# Altium PCB JIGUANG.PCBDOC
Units mm, origin at the board's own origin, x right, y up, seen from the top; angles counter-clockwise.
Board outline 932.43 x 301.62 mm, 2 copper layers (Top Layer, Bottom Layer); 64 components, 31 nets, 187 pads, 40 vias.
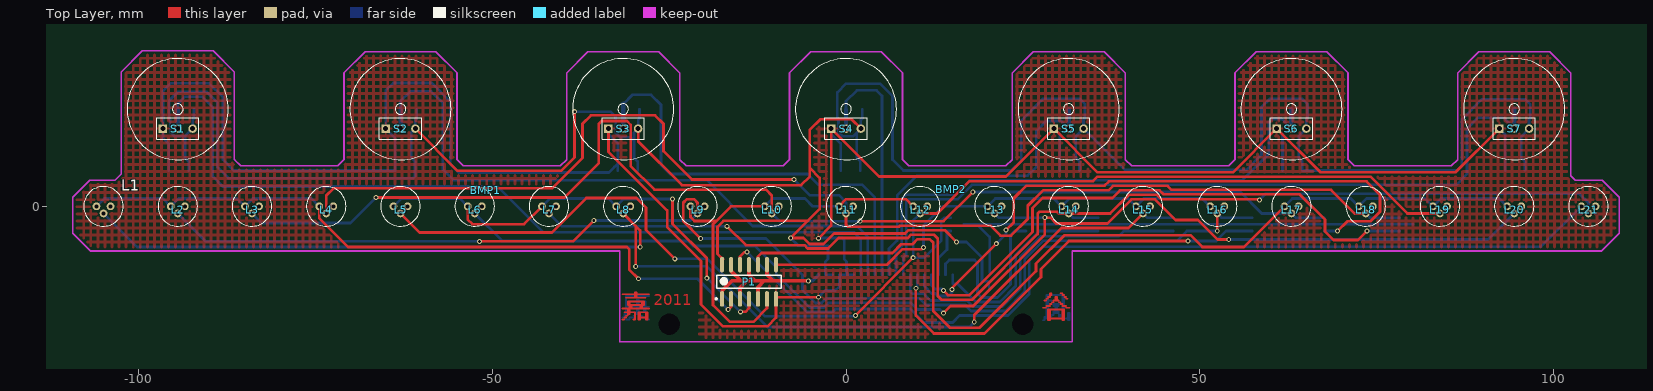
[diagram p0: Top Layer view]
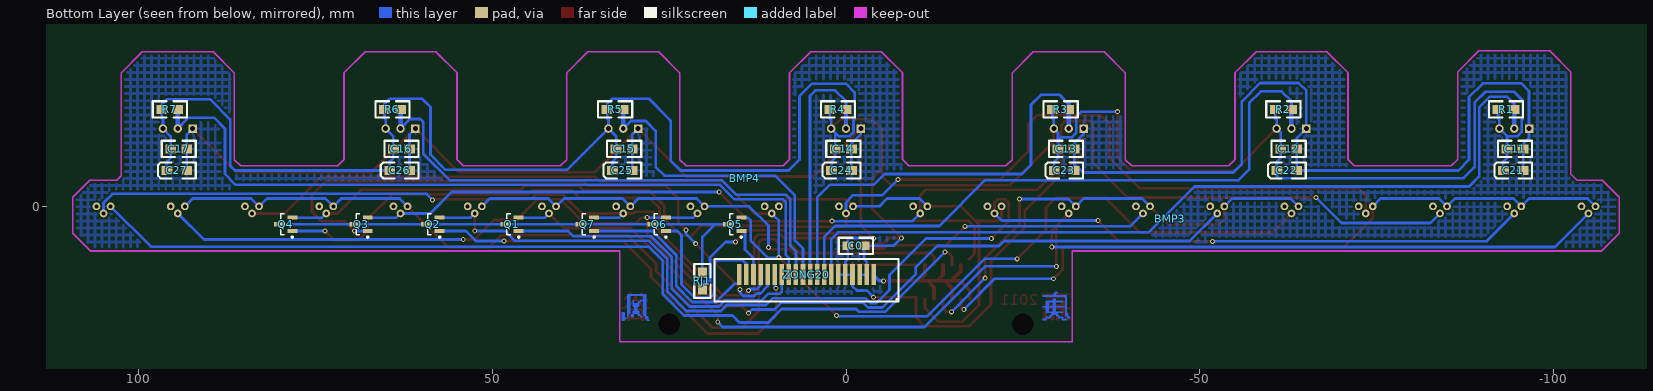
[diagram p1: Bottom Layer view, seen from below]

## Layer stack, top to bottom
Top Layer: signal copper 0.0356
Dielectric: dielectric 0.32, FR-4, Dk 4.8
Bottom Layer: signal copper 0.0356

## Board outline
-415.671,127.238 -415.671,-172.609 514.985,-172.609 516.763,-174.387 516.636,-174.26 516.636,126.476

## Design rules (kind name [scope] priority, off if disabled: settings)
Clearance [All] p1: gap=0.254
ComponentClearance [All] p1 off: gap=0.254 collisioncheckmode=3 verticalgap=0.254
PolygonConnect [All] p1: connectstyle=Relief reliefconductorwidth=0.254 reliefentries=4 polygonreliefangle="90 Angle"
RoutingVias [All] p1: holewidth=0.4 width=0.7 viastyle="Through Hole" minholewidth=0.4 minwidth=0.7 maxholewidth=0.711 maxwidth=1.27
SolderMaskExpansion [All] p1: expansion=0.102
TestPointUsage [All] p1: valid=0 allowmultiple=FALSE
Testpoint [All] p1: side=15 testpointundercomponent=TRUE minsize=1.016 maxsize=2.54 preferedsize=1.524 minholesize=0 maxholesize=1.016 preferedholesize=0.813 testpointgrid=0.025 style=1023 order=0123456789
Width [All] p1: maxlimit=1.778 minlimit=0.254 preferedwidth=0.254 toplayer_prefwidth=0.381 bottomlayer_prefwidth=0.381 minimp=50.000000 maximp=50.000000 favimp=50.000000
18 further rules are at their usual default settings.

## Classes and differential pairs
component class jiguang: C0 C11 C12 C13 C14 C15 C16 C17 C21 C22 C23 C24 C25 C26 C27 L1 L2 L3 L4 L5 L6 L7 L8 L9 L10 L11 L12 L13 L14 L15 L16 L17 L18 L19 L20 L21 P1 Q1 Q2 Q3 Q4 Q5 Q6 Q7 R1 R2 R3 R4 R5 R6 R7 RJ1 S1 S2 S3 S4 S5 S6 S7 ZONG20

## Components (designator, comment, footprint, x,y, rotation, side; value= is the part's Value field where it differs from the comment)
BMP1 "" BMP1#1 -50.927,2.286 r0 top
BMP2 "" BMP1#2 14.859,2.413 r0 top
BMP3 "" BMP1#3 -45.847,-1.778 r0 bottom
BMP4 "" BMP1#4 14.351,3.937 r0 bottom
C0 "CAP" 0805BB -2.54,-5.588 r0 top
C11 "CAP" 0805BB -93.472,8.112 r180 top
C12 "CAP" 0805BB -61.468,8.112 r180 top
C13 "CAP" 0805BB -29.972,8.112 r180 top
C14 "CAP" 0805BB 1.524,8.112 r180 top
C15 "CAP" 0805BB 32.512,8.112 r180 top
C16 "CAP" 0805BB 64.008,8.112 r180 top
C17 "CAP" 0805BB 95.504,8.112 r180 top
C21 "CAP2" 3216B -92.964,5.064 r0 top
C22 "CAP2" 3216B -60.96,5.064 r0 top
C23 "CAP2" 3216B -29.464,5.064 r0 top
C24 "CAP2" 3216B 2.032,5.064 r0 top
C25 "CAP2" 3216B 33.02,5.064 r0 top
C26 "CAP2" 3216B 64.516,5.064 r0 top
C27 "CAP2" 3216B 96.012,5.064 r0 top
L1 "CON3" FASHE -105,-0.016 r0 top
L2 "CON3" FASHE -94.5,-0.016 r0 top
L3 "CON3" FASHE -84,-0.016 r0 top
L4 "CON3" FASHE -73.5,-0.016 r0 top
L5 "CON3" FASHE -63,-0.016 r0 top
L6 "CON3" FASHE -52.5,-0.016 r0 top
L7 "CON3" FASHE -42,-0.016 r0 top
L8 "CON3" FASHE -31.5,-0.016 r0 top
L9 "CON3" FASHE -21,-0.016 r0 top
L10 "CON3" FASHE -10.5,-0.016 r0 top
L11 "CON3" FASHE 0,-0.016 r0 top
L12 "CON3" FASHE 10.5,-0.016 r0 top
L13 "CON3" FASHE 21,-0.016 r0 top
L14 "CON3" FASHE 31.5,-0.016 r0 top
L15 "CON3" FASHE 42,-0.016 r0 top
L16 "CON3" FASHE 52.5,-0.016 r0 top
L17 "CON3" FASHE 63,-0.016 r0 top
L18 "CON3" FASHE 73.5,-0.016 r0 top
L19 "CON3" FASHE 84,-0.016 r0 top
L20 "CON3" FASHE 94.5,-0.016 r0 top
L21 "CON3" FASHE 105,-0.016 r0 top
P1 "Header 7X2A" 74LS04SOP -13.716,-10.684 r90 top
Q1 "2N3904" 3904 47.244,-2.556 r0 bottom
Q2 "2N3904" 3904 58.42,-2.556 r0 bottom
Q3 "2N3904" 3904 68.58,-2.556 r0 bottom
Q4 "2N3904" 3904 79.248,-2.556 r0 bottom
Q5 "2N3904" 3904 15.748,-2.556 r0 bottom
Q6 "2N3904" 3904 26.416,-2.556 r0 bottom
Q7 "2N3904" 3904 36.576,-2.556 r0 bottom
R1 "RES2" 0805BB -94.488,13.7 r0 top
R2 "RES2" 0805BB -62.992,13.7 r0 top
R3 "RES2" 0805BB -31.496,13.7 r0 top
R4 "RES2" 0805BB 0,13.7 r0 top
R5 "RES2" 0805BB 31.496,13.7 r0 top
R6 "RES2" 0805BB 62.992,13.7 r0 top
R7 "RES2" 0805BB 94.488,13.7 r0 top
RJ1 "Res1" 0805 20.32,-11.7 r90 bottom
S1 "CON3" JIESHOU -94.5,10.984 r0 top
S2 "CON3" JIESHOU -63,10.984 r0 top
S3 "CON3" JIESHOU -31.5,10.984 r0 top
S4 "CON3" JIESHOU 0,10.984 r0 top
S5 "CON3" JIESHOU 31.5,10.984 r0 top
S6 "CON3" JIESHOU 63,10.984 r0 top
S7 "CON3" JIESHOU 94.5,10.984 r0 top
ZONG20 "CON20" ZONG20 5.08,-9.668 r0 top

## Footprints (in the part's own frame and the unit in brackets; to place one, negate y for a bottom-side part, rotate by r counter-clockwise, add the part's x,y. Pads: shape width x height; smd on the part's side, far side on the other; paste and mask are expansions set on the pad)
74LS04SOP [mm]
  oval 2.2x0.6 smd: 1(-2.425,3.81) 2(-2.425,2.54) 3(-2.425,1.27) 4(-2.425,0) 5(-2.425,-1.27) 6(-2.425,-2.54) 7(-2.425,-3.81) 8(2.425,-3.81) 9(2.425,-2.54) 10(2.425,-1.27) 11(2.425,0) 12(2.425,1.27) 13(2.425,2.54) 14(2.425,3.81)
  silkscreen extent -2.55,-4.55 0.93,4.78
0805 [mil]
  rect 60x50 smd: 1(0,0) 2(90,0)
  silkscreen extent -50,-45 140,45
0805BB [mil]
  rect 60x50 smd far side: 1(0,0) 2(90,0)
3216B [mil]
  rect 60x50 smd far side: 1(0,0) 2(-110,0)
3904 [mm] "SOT23, 3-Leads, Body 3.0x2.5mm (max), Pitch 0.95mm, IPC Medium Density"
  rect 1.4x0.6 smd: 1(-0.95,-0.95) 2(-0.95,0.95) 3(0.95,0)
  silkscreen extent -1.07,-1.5 0.7,1.92
BMP1#1 [mm]
  Top Layer lines w0.254: 19.304,-18.288 19.558,-18.288 ; 19.304,-16.764 23.114,-16.764 ; 19.304,-14.732 23.114,-14.732 ; 19.558,-18.034 19.812,-18.034 ; 19.558,-17.272 21.082,-17.272 21.082,-18.288 20.828,-18.288 ; 19.812,-17.78 20.066,-17.78 20.066,-16.764 ; 19.812,-15.24 22.606,-15.24 ; 20.066,-17.526 20.32,-17.526 20.32,-15.748 ; 20.066,-17.018 20.32,-17.018 ; 20.066,-16.002 20.32,-16.002 ; 20.32,-16.51 20.574,-16.51 ; 20.574,-16.764 20.574,-16.256 ; 21.082,-15.24 21.082,-14.478 21.336,-14.478 21.336,-15.24 ; 21.082,-14.986 21.336,-14.986 ; 21.59,-18.034 22.86,-18.034 ; 21.59,-17.78 21.844,-17.78 ; 21.59,-17.526 21.844,-17.526 ; 21.844,-17.272 21.844,-18.288 21.59,-18.288 21.59,-17.272 22.86,-17.272 22.86,-18.288 22.606,-18.288 22.606,-17.272 ; 21.844,-16.764 21.844,-16.256 ; 21.844,-16.51 22.098,-16.51 ; 22.098,-16.764 22.098,-15.748 ; 22.098,-16.002 22.352,-16.002 ; 22.606,-17.78 22.86,-17.78 ; 22.606,-17.526 22.86,-17.526 ; 20.066,-16.256 20.066,-15.748 22.352,-15.748 22.352,-16.256 20.066,-16.256
BMP1#2 [mm]
  Top Layer lines w0.254: 12.954,-16.764 13.462,-16.764 ; 13.208,-15.748 13.462,-15.748 ; 13.462,-16.51 13.97,-16.51 ; 13.462,-15.494 13.716,-15.494 ; 13.716,-18.288 16.002,-18.288 ; 13.716,-18.034 13.97,-18.034 ; 13.716,-17.78 13.97,-17.78 ; 13.716,-17.526 13.97,-17.526 ; 13.716,-17.272 13.97,-17.272 ; 13.716,-15.24 13.97,-15.24 13.97,-14.732 14.224,-14.732 ; 13.97,-17.018 13.97,-18.542 13.716,-18.542 13.716,-17.018 16.002,-17.018 16.002,-18.542 15.748,-18.542 15.748,-17.018 ; 13.97,-16.256 14.224,-16.256 ; 13.97,-14.986 14.224,-14.986 ; 14.224,-16.002 14.478,-16.002 ; 14.478,-15.748 15.24,-15.748 ; 14.732,-15.748 14.732,-15.24 14.986,-15.24 14.986,-15.748 ; 14.732,-15.494 14.986,-15.494 ; 15.24,-16.002 15.494,-16.002 ; 15.494,-16.256 15.748,-16.256 ; 15.494,-14.732 15.748,-14.732 ; 15.748,-18.034 16.002,-18.034 ; 15.748,-17.78 16.002,-17.78 ; 15.748,-17.526 16.002,-17.526 ; 15.748,-17.272 16.002,-17.272 ; 15.748,-16.51 16.256,-16.51 ; 15.748,-14.986 16.002,-14.986 ; 16.002,-15.24 16.256,-15.24 ; 16.256,-16.764 16.764,-16.764 ; 16.256,-15.494 16.51,-15.494
BMP1#3 [mm]
  Top Layer lines w0.254: 14.224,13.97 14.478,13.97 14.478,13.462 14.732,13.462 ; 14.478,13.716 14.732,13.716 14.732,10.922 18.034,10.922 ; 14.732,14.224 15.24,14.224 ; 14.732,12.446 18.034,12.446 ; 15.24,13.97 15.748,13.97 ; 15.24,13.208 17.526,13.208 17.526,11.684 15.24,11.684 ; 15.748,13.716 16.002,13.716 16.002,13.208 ; 16.002,13.462 16.764,13.462 ; 16.002,10.414 16.256,10.414 16.256,10.922 ; 16.256,13.462 16.256,11.43 16.51,11.43 16.51,13.462 ; 16.256,12.954 16.51,12.954 ; 16.256,12.7 16.51,12.7 ; 16.256,12.192 16.51,12.192 ; 16.256,11.938 16.51,11.938 ; 16.256,10.668 16.51,10.668 ; 16.764,13.208 16.764,13.716 17.018,13.716 ; 17.018,13.97 17.526,13.97 ; 17.272,13.208 17.272,11.684 ; 17.272,12.954 17.526,12.954 ; 17.272,12.7 17.526,12.7 ; 17.272,12.192 17.526,12.192 ; 17.272,11.938 17.526,11.938 ; 17.526,14.224 18.034,14.224
BMP1#4 [mm]
  Top Layer lines w0.254: 13.462,20.066 13.716,20.066 13.716,19.558 13.97,19.558 ; 13.716,19.812 13.97,19.812 13.97,16.51 16.51,16.51 16.51,19.558 ; 13.97,19.304 14.224,19.304 14.224,16.51 ; 13.97,19.05 14.224,19.05 ; 13.97,18.796 14.224,18.796 ; 13.97,18.542 14.224,18.542 ; 13.97,18.288 14.224,18.288 ; 13.97,18.034 14.224,18.034 ; 13.97,17.78 14.224,17.78 ; 13.97,17.526 14.224,17.526 ; 13.97,17.272 14.732,17.272 ; 13.97,17.018 14.224,17.018 ; 13.97,16.764 14.224,16.764 ; 14.478,19.558 14.732,19.558 ; 14.732,19.304 14.986,19.304 14.986,18.796 15.748,18.796 15.748,19.558 16.002,19.558 ; 14.732,17.526 14.986,17.526 14.986,18.034 15.748,18.034 15.748,17.272 ; 14.986,19.05 15.748,19.05 ; 14.986,17.78 15.748,17.78 ; 15.24,19.05 15.24,17.78 ; 15.24,18.542 15.494,18.542 ; 15.24,18.288 15.494,18.288 ; 15.494,19.05 15.494,17.78 ; 15.748,19.304 16.002,19.304 ; 16.256,18.796 16.51,18.796 ; 16.256,18.542 16.51,18.542 ; 16.256,18.288 16.51,18.288 ; 16.256,18.034 16.51,18.034 ; 16.256,17.78 16.51,17.78 ; 16.256,17.526 16.51,17.526 ; 16.256,17.272 16.51,17.272 ; 16.256,17.018 16.51,17.018 ; 16.256,16.764 16.51,16.764 ; 16.256,16.51 16.256,19.05 16.51,19.05 ; 16.764,19.812 17.272,19.812 ; 17.018,19.558 17.272,19.558 ; 17.018,19.304 17.272,19.304 ; 17.018,20.066 17.018,19.05 17.272,19.05 17.272,20.066 17.018,20.066
FASHE [mm]
  round 1.1 hole 0.55: 1(0,-1) 2(-1,0) 3(1,0)
  silkscreen extent -2.8,-2.8 2.8,2.8
JIESHOU [mm]
  rect 1.2x1.2 hole 0.7: 1(-2.1,0)
  round 1.2 hole 0.7: 2(0,0) 3(2.1,0)
  silkscreen extent -7.15,-4.4 7.15,9.9
ZONG20 [mm]
  rect 0.65x3 smd far side: 1(-9,0) 2(-8,0) 3(-7,0) 4(-6,0) 5(-5,0) 6(-4,0) 7(-3,0) 8(-2,0) 9(-1,0) 10(0,0) 11(1,0) 12(2,0) 13(3,0) 14(4,0) 15(5,0) 16(6,0) 17(7,0) 18(8,0) 19(9,0) 20(10,0)

## Part data
C0 C11 C12 C13 C14 C15 C16 C17: "Capacitor"
C21 C22 C23 C24 C25 C26 C27: library part "CAPACITOR POL", "Capacitor"
L1 L2 L3 L4 L5 L6 L7 L8 L9 L10 L11 L12 L13 L14 L15 L16 L17 L18 L19 L20 L21 S1 S2 S3 S4 S5 S6 S7 ZONG20: "Connector"
P1: "Header, 7-Pin, Dual row"
Q1 Q2 Q3 Q4 Q5 Q6 Q7: "NPN General Purpose Amplifier"
RJ1: "Resistor"

## Free pads (board coordinates)
  round 0 hole 3: 0(-25,-16.7) 0(25,-16.7)

## Via types
v1: diameter 0.7, hole 0.4, Top Layer to Bottom Layer, 40 vias

## Nets (pads, with @x,y where several pads share a name; then routed paths per layer and width w, separated by ;. In a path a pad name is that pad's centre, name@x,y a point inside that pad or via, vN(x,y) a via of type N, cw(c..) or ccw(c..) an arc to the next point about the centre after c; other vN are vias at no path point)
-1: L1.2 L2.2 L3.2 L4.2 P1.2 | length 102.5
  Top Layer w0.381: L4.2 -74.5,-1.691 -70.427,-5.764 -30.981,-5.764 -30.67,-6.074 -30.67,-8.919 v1(-29.337,-10.252) ; v1(-16.662,-14.621) -16.256,-14.215 P1.2
  Bottom Layer w0.381: L1.2 -104.882,1.102 -96.618,1.102 L2.2 -94.382,1.102 -86.118,1.102 L3.2 -83.882,1.102 -75.618,1.102 L4.2 ; v1(-29.337,-10.252) -21.031,-10.252 v1(-16.662,-14.621)
-2: L5.2 L6.2 L7.2 L8.2 P1.4 | length 67.6
  Top Layer w0.381: L6.2 -53.5,-1.863 -52.832,-2.531 -45.515,-2.531 L7.2 ; v1(-24.536,1.025) -24.536,-2.505 -19.685,-7.357 v1(-19.685,-10.176) ; v1(-14.935,-14.926) -14.224,-14.926 -13.716,-14.418 P1.4
  Bottom Layer w0.381: L5.2 -62.882,1.102 -54.618,1.102 L6.2 ; L7.2 -41.882,1.102 -33.618,1.102 L8.2 -31.459,1.025 v1(-24.536,1.025) ; v1(-19.685,-10.176) v1(-14.935,-14.926)
-3: L9.2 L10.2 L11.2 L12.2 P1.6 | length 58.7
  Top Layer w0.381: L9.2 -22,-1.54 -21.448,-2.092 -18.332,-2.092 ; L10.2 -16.256,-0.016 -18.332,-2.092 ; P1.6 -11.176,-14.418 -13.111,-16.353 -16.429,-16.353 -18.796,-13.986 -18.796,-2.556 -18.332,-2.092 ; L11.2 0.016,1 8.484,1 L12.2
  Bottom Layer w0.381: L10.2 -10.382,1.102 -5.817,1.102 -4.699,-0.016 L11.2
-4: L13.2 L14.2 L15.2 L16.2 P1.8 | length 69.4
  Top Layer w0.381: P1.8 -9.906,-8.271 5.817,-8.271 8.009,-6.078 10.727,-6.078 v1(10.973,-5.833)
  Bottom Layer w0.381: v1(10.973,-5.833) 10.973,-2.734 13.691,-0.016 L13.2 21.118,1.102 29.382,1.102 L14.2 31.618,1.102 39.882,1.102 L15.2 42.118,1.102 50.382,1.102 L16.2
-5: L17.2 L18.2 L19.2 L20.2 P1.10 | length 130.8
  Top Layer w0.381: P1.10 -12.446,-7.128 -11.92,-6.602 6.546,-6.602 7.772,-5.375 9.391,-5.375 10.109,-4.657 11.836,-4.657 12.337,-5.158 12.337,-14.817 14.707,-17.186 18.875,-17.186 26.883,-9.178 26.883,-8.109 30.868,-4.124 48.768,-4.124 50.401,-5.756 56.26,-5.756 L17.2
  Bottom Layer w0.381: L17.2 63.118,1.102 71.382,1.102 L18.2 73.618,1.102 81.882,1.102 L19.2 84.118,1.102 92.382,1.102 L20.2
-6: L21.2 P1.12 | length 134.4
  Top Layer w0.381: P1.12 -14.986,-7.103 -14.376,-6.493 v1(-13.995,-6.493)
  Bottom Layer w0.381: v1(-13.995,-6.493) -5.546,-14.942 -1.845,-14.942 -1.448,-14.545 9.109,-14.545 10.995,-16.432 15.095,-16.432 16.08,-15.446 22.908,-15.446 25.908,-12.446 25.908,-7.756 27.949,-5.715 98.301,-5.715 L21.2
A0: Q1.2 ZONG20.14 | length 47.6
  Bottom Layer w0.381: ZONG20.14 9.08,-12.075 9.398,-12.393 11.014,-12.393 11.953,-13.333 17.127,-13.333 17.97,-14.176 22.146,-14.176 24.638,-11.684 24.638,-7.158 27.538,-4.258 38.532,-4.258 39.284,-3.506 Q1.2
A1: Q2.2 ZONG20.15 | length 61.2
  Top Layer w0.381: v1(9.881,-11.598) 9.881,-15.459 12.421,-17.999 19.591,-17.999 27.565,-10.025 27.565,-8.871 31.518,-4.918 v1(48.362,-4.918)
  Bottom Layer w0.381: v1(9.881,-11.598) 10.08,-11.399 ZONG20.15 ; v1(48.362,-4.918) 52.349,-4.918 53.762,-3.506 Q2.2
A2: Q3.2 ZONG20.16 | length 88.2
  Top Layer w0.381: v1(15.011,-11.776) 15.011,-11.548 v1(21.26,-5.299) ; v1(22.631,-3.369) 23.724,-2.277 23.724,1.127 25.502,2.905 36.551,2.905 37.164,3.519 73.612,3.519 75.514,1.617 75.514,-0.778 74.168,-2.124 70.902,-2.124 v1(69.52,-3.506)
  Bottom Layer w0.381: ZONG20.16 11.08,-11.299 12.116,-12.335 12.617,-12.335 12.979,-12.698 14.478,-12.698 15.011,-12.164 v1(15.011,-11.776) ; v1(21.26,-5.299) 22.631,-3.928 v1(22.631,-3.369) ; Q3.2 v1(69.52,-3.506)
A3: Q4.2 ZONG20.17 | length 80.8
  Top Layer w0.381: v1(13.767,-11.903) 14.434,-12.571 17.443,-12.571 26.365,-3.648 26.365,-0.262 27.805,1.178 37.664,1.178 38.735,2.249 44.352,2.249 44.907,1.693 64.153,1.693 67.742,-1.896 67.742,-3.572 68.936,-4.766 72.4,-4.766 v1(73.66,-3.506)
  Bottom Layer w0.381: ZONG20.17 12.08,-11.192 12.588,-11.7 13.564,-11.7 v1(13.767,-11.903) ; v1(73.66,-3.506) Q4.2
A4: Q5.2 ZONG20.18 | length 7.2
  Bottom Layer w0.381: ZONG20.18 13.08,-7.332 14.277,-6.136 14.277,-3.506 Q5.2
A5: Q6.2 ZONG20.19 | length 25.8
  Bottom Layer w0.381: ZONG20.19 14.08,-8.144 14.613,-7.611 18.199,-7.611 18.605,-8.017 18.605,-12.367 19.145,-12.906 21.399,-12.906 23.266,-11.04 23.266,-4.09 23.851,-3.506 Q6.2
A6: Q7.2 ZONG20.20 | length 29.7
  Bottom Layer w0.381: ZONG20.20 15.08,-10.977 15.806,-10.977 18.37,-13.541 21.765,-13.541 24.003,-11.303 24.003,-6.895 27.392,-3.506 Q7.2
GND: C0.2 C11.2 C12.2 C13.2 C14.2 C15.2 C16.2 C17.2 C21.2 C22.2 C23.2 C24.2 C25.2 C26.2 C27.2 P1.7 S1.1 S2.1 S3.1 S4.1 S5.1 S6.1 S7.1 ZONG20.4 ZONG20.5 ZONG20.6 | length 337.3
  Top Layer w0.381: S3.1 -33.6,7.701 -25.297,-0.602 -25.297,-2.936 -20.498,-7.735 -20.498,-13.873 -17.382,-16.988 -11.13,-16.988 -9.906,-15.764 P1.7 -9.906,-12.868 v1(-3.912,-12.868) ; v1(-3.912,-4.537) -2.1,-2.726 S4.1 4.684,4.2 22.616,4.2 S5.1 35.595,4.789 54.705,4.789 S6.1 67.074,4.81 86.226,4.81 S7.1
  Bottom Layer w0.381: C21.2 C11.2 -95.758,8.786 -96.6,9.628 S1.1 -96.6,16.283 -95.504,17.379 -90.065,17.379 -88.113,15.427 -88.113,6.588 -86.589,5.064 C22.2 C12.2 -63.754,9.638 S2.1 -65.1,16.342 -64.008,17.434 -58.572,17.434 -55.982,14.843 -55.982,6.004 -54.762,4.785 -33.528,4.785 -32.753,5.559 -32.258,6.055 ; S3.1 -33.6,10.216 -32.258,8.874 C13.2 -32.258,6.055 ; C23.2 -32.258,6.055 ; v1(-3.912,-12.868) -2.972,-11.929 -1.524,-11.929 -0.92,-11.325 ZONG20.4 ZONG20.5 ; v1(-3.912,-4.537) -3.861,-4.486 -0.508,-4.486 -0.254,-4.74 C0.2 -0.254,-7.48 0.08,-7.814 ZONG20.5 ; S4.1 -2.1,10.212 -0.762,8.874 C14.2 C24.2 ; ZONG20.6 ZONG20.5 ; S5.1 30.226,10.158 C15.2 C25.2 ; S6.1 61.722,10.162 C16.2 C26.2 ; S7.1 93.218,10.166 C17.2 C27.2
IN: P1.1 P1.3 P1.5 P1.9 P1.11 P1.13 ZONG20.1 | length 29.9
  Top Layer w0.508: P1.1 -17.526,-11.954 -16.129,-10.557 -14.859,-10.557 ; P1.13 -16.256,-9.16 -14.859,-10.557 ; P1.3 -14.986,-11.573 -13.97,-10.557 ; P1.11 -13.716,-9.668 -12.827,-10.557 ; P1.5 -12.446,-11.446 -11.557,-10.557 ; P1.9 -11.176,-9.668 -10.287,-10.557 ; v1(-5.334,-10.557) -10.287,-10.557 ; -14.859,-10.557 -13.97,-10.557 ; -13.97,-10.557 -12.827,-10.557 ; -12.827,-10.557 -11.557,-10.557 ; -11.557,-10.557 -10.287,-10.557
  Bottom Layer w0.508: v1(-5.334,-10.557) -4.699,-10.557 -3.92,-9.778 ZONG20.1
NetQ1_3: Q1.3 Q2.3 Q3.3 Q4.3 Q5.3 Q6.3 Q7.3 RJ1.2 | length 71.1
  Bottom Layer w0.381: Q5.3 18.542,-2.556 ; RJ1.2 20.32,-4.334 18.542,-2.556 ; Q4.3 Q3.3 Q2.3 48.387,-2.556 Q1.3 Q7.3 Q6.3 18.542,-2.556
O1: R1.1 S1.2 ZONG20.7 | length 144
  Bottom Layer w0.381: ZONG20.7 2.08,-4.62 1.143,-3.683 -42.799,-3.683 -49.276,2.794 -88.138,2.794 -89.535,4.191 -89.535,13.97 -91.059,15.494 -93.472,15.494 -94.5,14.466 ; R1.1@-94.5,13.7 -94.5,14.466 ; R1.1@-94.5,13.7 -94.5,14.466 ; R1.1@-94.5,13.7 -94.5,14.466 ; R1.1@-94.5,13.7 -94.5,14.466 ; R1.1@-94.5,13.7 -94.5,14.466 ; R1.1@-94.5,13.7 -94.5,14.466 ; R1.1@-94.5,13.7 -94.5,14.466 ; R1.1@-94.5,13.7 -94.5,14.466
  Bottom Layer w0.635: S1.2 R1.1@-94.5,13.7 ; S1.2 R1.1@-94.5,13.7 ; S1.2 R1.1@-94.5,13.7 ; S1.2 R1.1@-94.5,13.7 ; S1.2 R1.1@-94.5,13.7 ; S1.2 R1.1@-94.5,13.7 ; S1.2 R1.1@-94.5,13.7 ; S1.2 R1.1@-94.5,13.7
O2: R2.1 S2.2 ZONG20.8 | length 89.9
  Bottom Layer w0.381: R2.1 -62.992,14.859 -61.595,16.256 -58.674,16.256 -57.023,14.605 -57.023,5.207 -55.499,3.683 -19.685,3.683 -13.208,-2.794 1.524,-2.794 3.08,-4.35 ZONG20.8
  Bottom Layer w0.635: S2.2 R2.1@-63,13.692
O3: R3.1 S3.2 ZONG20.9 | length 61.5
  Bottom Layer w0.381: -31.496,14.478 -30.226,15.748 -27.559,15.748 -26.162,14.351 -26.162,5.842 -24.892,4.572 -5.461,4.572 -3.937,3.048 2.286,3.048 4.08,1.254 ZONG20.9
  Bottom Layer w0.635: S3.2 R3.1@-31.5,13.696 ; R3.1 -31.496,14.478
O4: R4.1 S4.2 ZONG20.10 | length 35.2
  Bottom Layer w0.381: R4.1 0,14.859 1.524,16.383 4.318,16.383 5.08,15.621 ZONG20.10
  Bottom Layer w0.635: S4.2 R4.1
O5: R5.1 S5.2 ZONG20.11 | length 46.4
  Bottom Layer w0.381: ZONG20.11 6.08,-6.001 7.235,-4.846 7.235,1.508 10.055,4.327 25.679,4.327 26.924,5.572 26.924,10.652 28.321,12.049 30.435,12.049 S5.2
  Bottom Layer w0.635: R5.1 31.5,13.696 S5.2
O6: R6.1 S6.2 ZONG20.12 | length 76.7
  Bottom Layer w0.381: ZONG20.12 7.08,-6.414 7.87,-5.623 7.87,1 8.484,1.614 15.473,1.614 17.526,3.667 56.032,3.667 59.792,7.426 59.792,11.922 60.198,12.328 61.656,12.328 S6.2
  Bottom Layer w0.635: R6.1 63,13.692 S6.2
O7: R7.1 S7.2 ZONG20.13 | length 128.4
  Bottom Layer w0.381: ZONG20.13 8.08,-7.294 8.505,-6.868 8.505,0.594 8.89,0.979 15.752,0.979 17.805,3.032 86.309,3.032 87.833,4.556 87.833,10.957 89.408,12.532 92.952,12.532 S7.2
  Bottom Layer w0.635: S7.2 R7.1@94.5,13.7 ; S7.2 R7.1@94.5,13.7 ; S7.2 R7.1@94.5,13.7 ; S7.2 R7.1@94.5,13.7 ; S7.2 R7.1@94.5,13.7 ; S7.2 R7.1@94.5,13.7 ; S7.2 R7.1@94.5,13.7 ; S7.2 R7.1@94.5,13.7 ; R7.1@94.5,13.7 R7.1@94.5,13.815 ; R7.1@94.5,13.7 R7.1@94.5,13.815 ; R7.1@94.5,13.7 R7.1@94.5,13.815 ; R7.1@94.5,13.7 R7.1@94.5,13.815 ; R7.1@94.5,13.7 R7.1@94.5,13.815 ; R7.1@94.5,13.7 R7.1@94.5,13.815 ; R7.1@94.5,13.7 R7.1@94.5,13.815 ; R7.1@94.5,13.7 R7.1@94.5,13.815
V01: L1.1 L8.1 L15.1 Q1.1 | length 176.4
  Top Layer w0.381: L8.1 -29.743,-2.773 ; v1(-29.743,-8.5) -29.743,-2.773 ; v1(-29.108,-5.769) -29.108,-3.408 -29.743,-2.773 ; v1(18.134,-16.374) 18.134,-15.402 30.472,-3.064 39.952,-3.064 L15.1
  Bottom Layer w0.381: L1.1 -100.247,-5.769 v1(-29.108,-5.769) ; v1(-29.743,-8.5) -19.66,-8.5 -11.093,-17.067 17.441,-17.067 v1(18.134,-16.374) ; L15.1 42.59,-1.606 Q1.1
V02: L2.1 L9.1 L16.1 Q2.1 | length 180.9
  Top Layer w0.381: v1(-51.816,-4.969) -38.608,-4.969 v1(-35.662,-2.023) ; L9.1 -21,0.492 -21.508,1 -22.504,1 -23.012,0.492 -23.012,-2.099 v1(-20.549,-4.563) ; v1(52.5,-3.498) L16.1
  Bottom Layer w0.381: L2.1 -90.547,-4.969 v1(-51.816,-4.969) ; v1(-35.662,-2.023) -22.007,-2.023 L9.1 ; v1(-20.549,-4.563) -11.328,-4.563 -6.147,-9.744 -6.147,-11.843 -4.318,-13.672 -3.438,-13.672 -2.794,-13.028 10.379,-13.028 11.318,-13.968 16.864,-13.968 17.707,-14.811 22.527,-14.811 25.273,-12.065 25.273,-7.493 27.873,-4.893 46.807,-4.893 48.202,-3.498 v1(52.5,-3.498) ; L16.1 53.09,-1.606 Q2.1
V03: L3.1 L10.1 L17.1 Q3.1 | length 175.4
  Top Layer w0.381: v1(-66.472,1.229) -39.82,1.229 -34.95,6.098 -34.95,11.668 -34.569,12.049 -30.988,12.049 -30.455,11.516 -30.455,5.699 -27.095,2.339 -11.331,2.339 -10.5,1.508 L10.1 ; v1(1.974,-2.117) 13.799,-2.117 v1(17.932,2.016)
  Bottom Layer w0.381: L3.1 -82.638,-2.378 -70.079,-2.378 v1(-66.472,1.229) ; L10.1 -9.399,-2.117 v1(1.974,-2.117) ; v1(17.932,2.016) 55.764,2.016 58.796,-1.016 L17.1 63.59,-1.606 Q3.1
V04: L4.1 L11.1 L18.1 Q4.1 | length 179
  Top Layer w0.381: L4.1 -73.5,1.508 -72.484,2.524 -41.554,2.524 -37.262,6.817 -37.262,11.668 -36.068,12.862 -27,12.862 -25.806,11.668 -25.806,7.782 -21.793,3.769 v1(-7.341,3.769) ; L11.1 0,-2.607 0.305,-2.912 7.479,-2.912 7.638,-2.752 20.415,-2.752 21.826,-4.163 23.332,-4.163 25.701,-1.794 25.701,0.071 27.879,2.249 37.122,2.249 37.757,2.884 45.459,2.884 46.014,2.328 68.589,2.328 71.933,-1.016 L18.1
  Bottom Layer w0.381: v1(-7.341,3.769) -5.131,1.559 -1.016,1.559 0,0.543 L11.1 ; L18.1 74.09,-1.606 Q4.1
V05: L5.1 L12.1 L19.1 Q5.1 | length 181.6
  Top Layer w0.381: L5.1 -60.292,-3.724 -41.605,-3.724 -36.728,1.152 -29.642,1.152 -28.296,-0.194 -28.296,-3.343 v1(-24.206,-7.433) ; v1(1.321,-15.459) v1(9.5,-7.28) ; L12.1 12.903,-1.016 17.472,3.553 34.923,3.553 35.523,4.154 74.215,4.154 79.384,-1.016 L19.1
  Bottom Layer w0.381: v1(-24.206,-7.433) -19.609,-7.433 -11.464,-15.577 1.203,-15.577 v1(1.321,-15.459) ; L12.1 10.16,-1.356 9.5,-2.016 v1(9.5,-7.28) 11.075,-7.28 13.462,-4.893 13.462,-2.048 13.904,-1.606 Q5.1
V06: L6.1 L13.1 L20.1 Q6.1 | length 173.9
  Top Layer w0.381: v1(13.792,-15.129) 14.808,-14.113 17.999,-14.113 28.118,-3.994 v1(28.118,-1.606) 28.911,-1.606 29.734,-2.429 36.978,-2.429 40.386,0.979 43.688,0.979 46.624,-1.958 49.791,-1.958 52.548,-4.715 v1(54.127,-4.715)
  Bottom Layer w0.381: L6.1 -48.598,-4.918 -22.341,-4.918 -21.63,-5.629 -12.896,-5.629 -9.853,-8.672 -9.853,-9.626 -5.172,-14.307 -3.125,-14.307 -2.48,-13.663 9.167,-13.663 10.106,-14.603 13.266,-14.603 v1(13.792,-15.129) ; L13.1 21.59,-1.606 Q6.1 v1(28.118,-1.606) ; v1(54.127,-4.715) 90.801,-4.715 L20.1
V07: L7.1 L14.1 L21.1 Q7.1 | length 173.5
  Top Layer w0.381: v1(-16.815,-2.835) -14.148,-5.502 -5.881,-5.502 -5.416,-5.967 -2.522,-5.967 -1.046,-4.491 8.739,-4.491 9.208,-4.022 12.406,-4.022 12.972,-4.588 12.972,-12.716 13.48,-13.224 17.831,-13.224 27.102,-3.953 27.102,-1.032 27.356,-0.778 29.856,-0.778 30.094,-1.016 L14.1 37.355,-1.016 39.984,1.614 43.995,1.614 44.63,0.979 58.391,0.979 v1(58.471,0.898)
  Bottom Layer w0.381: L7.1 -40.181,-2.835 v1(-16.815,-2.835) ; L14.1 32.09,-1.606 Q7.1 ; v1(58.471,0.898) 59.334,1.762 103.73,1.762 105,0.492 L21.1
VCC: C0.1 C11.1 C12.1 C13.1 C14.1 C15.1 C16.1 C17.1 C21.1 C22.1 C23.1 C24.1 C25.1 C26.1 C27.1 P1.14 R1.2 R2.2 R3.2 R4.2 R5.2 R6.2 R7.2 RJ1.1 S1.3 S2.3 S3.3 S4.3 S5.3 S6.3 S7.3 ZONG20.2 ZONG20.3 | length 431.8
  Top Layer w0.381: S2.3 -54.929,5.013 -40.279,5.013 -38.405,6.887 v1(-38.405,13.37) ; S3.3 -29.4,9.189 -23.185,2.974 -6.357,2.974 -5.105,4.226 -5.105,10.83 -3.632,12.303 0.781,12.303 S4.3 ; P1.14@-17.399,-7.493 -18.161,-6.731 -18.161,-2.921 -17.341,-2.101 -17.341,-2.041 -5.378,-2.041 ; -5.105,5.385 -3.734,4.013 -3.734,-0.397 v1(-7.823,-4.486) -5.999,-4.486 -5.153,-5.332 -3.173,-5.332 -1.697,-3.856 8.37,-3.856 8.839,-3.387 13.963,-3.387 v1(15.621,-5.045)
  Bottom Layer w0.381: C21.1 -92.964,6.334 -93.472,6.842 C11.1 -93.472,9.915 ; R1.2 -92.202,12.425 -92.4,12.227 S1.3 ; R2.2 -60.706,12.421 -60.9,12.227 S2.3 -61.468,10.416 C12.1 -61.468,6.842 -60.96,6.334 C22.1 -60.96,4.226 -61.214,3.972 -87.351,3.972 -88.9,5.521 -88.9,14.64 -90.449,16.189 -94.488,16.189 -95.707,14.97 -95.707,12.328 -95.555,12.176 -95.555,10.474 -94.996,9.915 -93.472,9.915 ; v1(-38.405,13.37) -33.292,13.37 -32.555,12.633 -32.555,10.365 -31.953,9.763 -30.48,9.763 -29.972,9.255 ; C23.1 -29.464,6.334 -29.972,6.842 C13.1 -29.972,9.255 ; R3.2 -29.21,12.417 -29.4,12.227 S3.3 -29.972,10.412 -29.972,9.255 ; v1(-7.823,-4.486) -6.722,-5.588 C0.1 -2.54,-7.459 -2.92,-7.839 ZONG20.2 ZONG20.3 ; C24.1 2.032,6.334 1.524,6.842 C14.1 1.524,10.408 ; R4.2 2.286,12.413 2.1,12.227 S4.3 1.524,10.408 ; v1(15.621,-5.045) 17.031,-5.045 19.241,-7.255 19.241,-10.62 20.066,-10.62 RJ1.1 ; C25.1 33.02,6.334 32.512,6.842 C15.1 32.512,9.896 S5.3 ; C27.1 96.012,6.334 95.504,6.842 C17.1 95.504,9.888 S7.3 96.6,12.252 96.774,12.426 R7.2 96.774,14.386 96.012,15.148 89.967,15.148 87.097,12.278 87.097,5.724 86.436,5.064 C26.1 64.516,6.334 64.008,6.842 C16.1 64.008,9.892 S6.3 65.1,12.252 65.278,12.43 R6.2 65.278,14.437 64.516,15.199 59.944,15.199 58.763,14.018 58.763,7.296 56.608,5.14 39.444,5.14 S5.3 ; -93.472,9.915 -93.469,9.915 S1.3 ; -93.472,9.915 S1.3 ; 1.524,10.408 1.031,9.915 -0.508,9.915 -1.056,10.463 -1.056,12.165 -1.219,12.328 -1.219,16.113 0,17.332 4.826,17.332 6.579,15.58 6.579,6.588 8.103,5.064 23.368,5.064 24.79,6.486 24.79,12.1 27.889,15.199 33.02,15.199 33.782,14.437 R5.2 33.782,12.409 33.6,12.227 S5.3
pads on no net: L1.3 L2.3 L3.3 L4.3 L5.3 L6.3 L7.3 L8.3 L9.3 L10.3 L11.3 L12.3 L13.3 L14.3 L15.3 L16.3 L17.3 L18.3 L19.3 L20.3 L21.3

## Polygon pours and split planes (outlines as drawn)
GND on Top Layer "Top Layer-No Net" (hatched 90Degree grid 1 track 0.4, remove dead copper): -113.919,26.924 -113.919,-24.511 114.046,-24.511 115.062,-25.527 113.538,-24.003 113.538,27.178
GND on Bottom Layer "Top Layer-No Net" (hatched 90Degree grid 1 track 0.4, remove dead copper): -114.808,27.432 -114.808,-25.527 -114.046,-24.765 115.316,-24.765 115.316,26.162 114.046,27.432

## Keep-outs
Keep-Out Layer:
  lines w0.254: -14.986,-19.177 32,-19.177 32,-6.35 38.354,-6.35 106.553,-6.35 ; -14.605,-19.177 -31.996,-19.177 -32,-19.173 -32,-6.35 -35.814,-6.35 -106.807,-6.35 -109.347,-3.81 -109.347,1.27 -106.934,3.683 -103.378,3.683 -102.5,4.561 -102.5,8.366 -102.5,18.984 ; 81.28,5.715 85.615,5.715 86.5,6.6 86.5,18.272 86.5,18.844 89.5,21.844 99.5,21.844 102.5,18.844 102.5,18.145 102.5,4.561 102.5,4.307 103.124,3.683 105.029,3.683 ; 81.534,5.715 75.057,5.715 71.885,5.715 71,6.6 71,18.272 71,18.844 68,21.844 58,21.844 55,18.844 55,18.272 55,6.6 54.115,5.715 49.911,5.715 43.18,5.715 40.385,5.715 39.5,6.6 39.5,18.399 39.5,18.844 36.5,21.844 26.5,21.844 23.5,18.844 23.5,18.399 23.5,6.6 22.615,5.715 18.415,5.715 11.811,5.715 8.885,5.715 8,6.6 8,18.272 8,18.844 5,21.844 -5,21.844 -8,18.844 -8,18.272 -8,6.6 -8.885,5.715 -11.684,5.715 -20.32,5.715 -22.615,5.715 -23.5,6.6 -23.5,18.399 -23.5,18.844 -26.5,21.844 -36.5,21.844 -39.5,18.844 -39.5,18.272 -39.5,6.6 -40.385,5.715 -45.339,5.715 -52.451,5.715 -54.115,5.715 -55,6.6 -55,18.399 -55,18.844 -58,21.844 -68,21.844 -71,18.844 -71,18.399 -71,6.6 -71.885,5.715 -85.598,5.715 -86.483,6.6 -86.5,6.6 -86.5,7.985 -86.5,18.653 -86.5,18.984 -89.5,21.984 -99.5,21.984 -102.5,18.984 ; 104.655,3.683 106.934,3.683 109.347,1.27 109.347,-3.81 106.807,-6.35 106.299,-6.35 ; -102.5,18.984 -102.5,18.984

## Other copper
Top Layer:
  text "2011" at -27.178,-13.97 h1.52